# EAGLE board board1_32u4 (EAGLE 8.6.1)
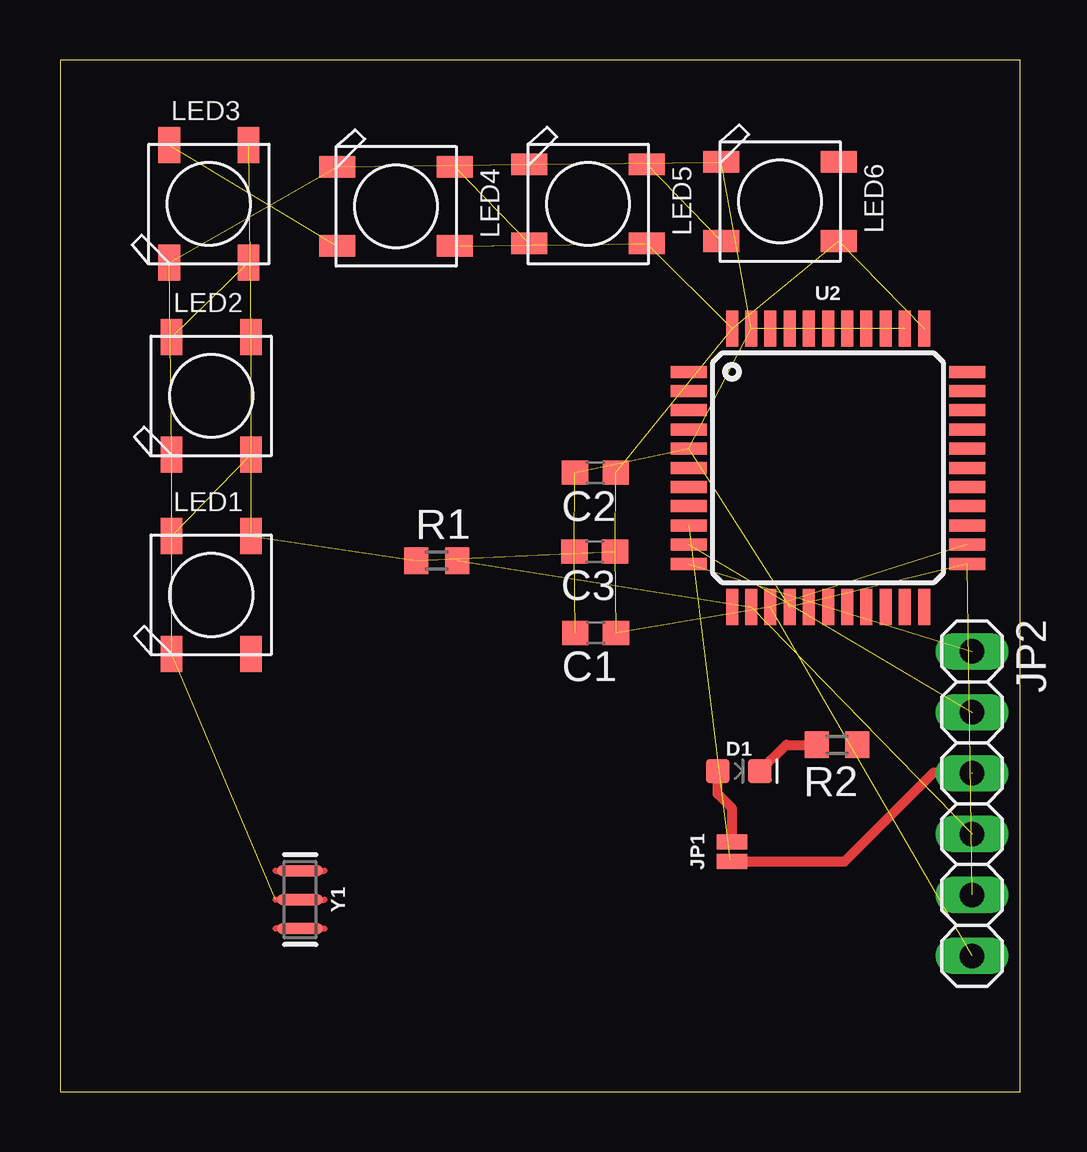
[diagram p0: board, top side]

Size 40 x 43 mm. Coordinates in mm from the lower left corner, seen from the top.
Outline: 0,0 40,0 40,43 0,43 0,0
Copper layers (1*16): Top 0.035mm / dielectric 1.5mm / Bottom 0.035mm
Design rules "default": minimum track width 6mil, minimum drill 0.35mm, track to track 6mil, track to pad 6mil, pad to pad 6mil, via to via 6mil, smd to smd 6mil, copper to edge 40mil, drill to drill 6mil, minimum pad ring 10mil, minimum via ring 8mil, stop-mask expansion 4mil, vias tented up to drill 0mil, thermal gap 10mil

## Footprints (pad centres in the part's own frame; a part is rotated, then mirrored left to right if it is on the bottom)
C0603 = smd 1.1 x 1: 1 -0.85,0; 2 0.85,0
LED-0603 = smd 1 x 1: A -0.877,0; C 0.877,0
SMT-JUMPER_2_NC_PASTE_NO-SILK = smd 0.635 x 1.27: 1 -0.406,0; 2 0.406,0
1X06 = drill 1.016 long: 1 -6.35,0; 2 -3.81,0; 3 -1.27,0; 4 1.27,0; 5 3.81,0; 6 6.35,0
WS2812B = smd 1.5 x 0.9: 1-VDD 2.45,-1.65; 2-DOUT 2.45,1.65; 3-GND -2.45,1.65; 4-DIN -2.45,-1.65
R0603 = smd 1 x 1.1: 1 -0.85,0; 2 0.85,0
TQFP44 = smd 1.5 x 0.5: 1 -5.8,4; 2 -5.8,3.2; 3 -5.8,2.4; 4 -5.8,1.6; 5 -5.8,0.8; 6 -5.8,0; 7 -5.8,-0.8; 8 -5.8,-1.6; 9 -5.8,-2.4; 10 -5.8,-3.2; 11 -5.8,-4; 23 5.8,-4; 24 5.8,-3.2; 25 5.8,-2.4; 26 5.8,-1.6; 27 5.8,-0.8; 28 5.8,0; 29 5.8,0.8; 30 5.8,1.6; 31 5.8,2.4; 32 5.8,3.2; 33 5.8,4 | smd 0.5 x 1.5: 12 -4,-5.8; 13 -3.2,-5.8; 14 -2.4,-5.8; 15 -1.6,-5.8; 16 -0.8,-5.8; 17 0,-5.8; 18 0.8,-5.8; 19 1.6,-5.8; 20 2.4,-5.8; 21 3.2,-5.8; 22 4,-5.8; 34 4,5.8; 35 3.2,5.8; 36 2.4,5.8; 37 1.6,5.8; 38 0.8,5.8; 39 0,5.8; 40 -0.8,5.8; 41 -1.6,5.8; 42 -2.4,5.8; 43 -3.2,5.8; 44 -4,5.8
RESONATOR-SMD-3.2X1.3 = smd 0.45 x 1.905: 1 -1.2,0; 2 0,0; 3 1.2,0

## Placement (x,y rotation side)
C1  4.7uF  [C0603]  22.32,19.12 180 top
C2  4.7uF  [C0603]  22.3,25.8 180 top
C3  0.1uF  [C0603]  22.28,22.5 180 top
D1  [LED-0603]  28.28,13.36 0 top
JP1  JUMPER-SMT_2_NC_PASTE_NO-SILK  [SMT-JUMPER_2_NC_PASTE_NO-SILK]  28,10 90 top
JP2  [1X06]  38,12 270 top
LED1  WS2812B5050  [WS2812B]  6.3,20.7 90 top
LED2  WS2812B5050  [WS2812B]  6.3,29 90 top
LED3  WS2812B5050  [WS2812B]  6.2,37 90 top
LED4  WS2812B5050  [WS2812B]  14,36.9 0 top
LED5  WS2812B5050  [WS2812B]  22,37 0 top
LED6  WS2812B5050  [WS2812B]  30,37.1 0 top
R1  [R0603]  15.7,22.13 0 top
R2  [R0603]  32.38,14.46 180 top
U2  32U4  [TQFP44]  32,26 0 top
Y1  8MHz  [RESONATOR-SMD-3.2X1.3]  10,8 270 top

## Library data of the parts
C1-C3 LED1-LED6 R1 R2 = adafruit
D1 = SparkFun-LED
JP1 = SparkFun-Jumpers
JP2 = pinhead
U2 = SparkFun-IC-Microcontroller; PROD_ID: IC-11161
Y1 = SparkFun-Clocks; PROD_ID: XTAL-08895

## Nets
ARDUINO10: JP2.4 R1.2 U2.13
ARDUINO11: JP1.1 JP2.3 U2.9
ARDUINO12: JP2.2 U2.10
ARDUINO13: JP2.1 U2.11
GND: C1.2 C2.2 C3.2 JP2.5 LED1.3-GND LED2.3-GND LED3.3-GND LED4.3-GND LED5.3-GND LED6.3-GND U2.5 U2.15 U2.23 U2.35 U2.43 Y1.2
LED_DATA: LED1.4-DIN
N$1: Y1.1
N$2: LED1.2-DOUT LED2.4-DIN
N$3: Y1.3
N$4: D1.C R2.2
N$8: D1.A JP1.2
N$9: LED2.2-DOUT LED3.4-DIN
N$10: LED3.2-DOUT LED4.4-DIN
N$11: LED4.2-DOUT LED5.4-DIN
N$12: LED5.2-DOUT LED6.4-DIN
VCC: C1.1 C2.1 C3.1 JP2.6 LED1.1-VDD LED2.1-VDD LED3.1-VDD LED4.1-VDD LED5.1-VDD LED6.1-VDD R1.1 U2.14 U2.24 U2.34 U2.44

## Tracks (layer width: path | path; a pad name or v marks a point on that pad's centre or on a via)
ARDUINO10  (2 unrouted)
ARDUINO11  (2 unrouted)
  Top 0.406: 27.91,9.68 JP1.1 32.69,9.59 36.4,13.3 37.97,13.3
ARDUINO12  (1 unrouted)
ARDUINO13  (1 unrouted)
GND  (15 unrouted)
N$2  (1 unrouted)
N$4
  Top 0.406: D1.C 30.26,14.46 R2.2
N$8
  Top 0.406: JP1.2 28,11.8 27.4,12.4 D1.A
N$9  (1 unrouted)
N$10  (1 unrouted)
N$11  (1 unrouted)
N$12  (1 unrouted)
VCC  (14 unrouted)